# EAGLE board leonino (EAGLE 6.5.0)
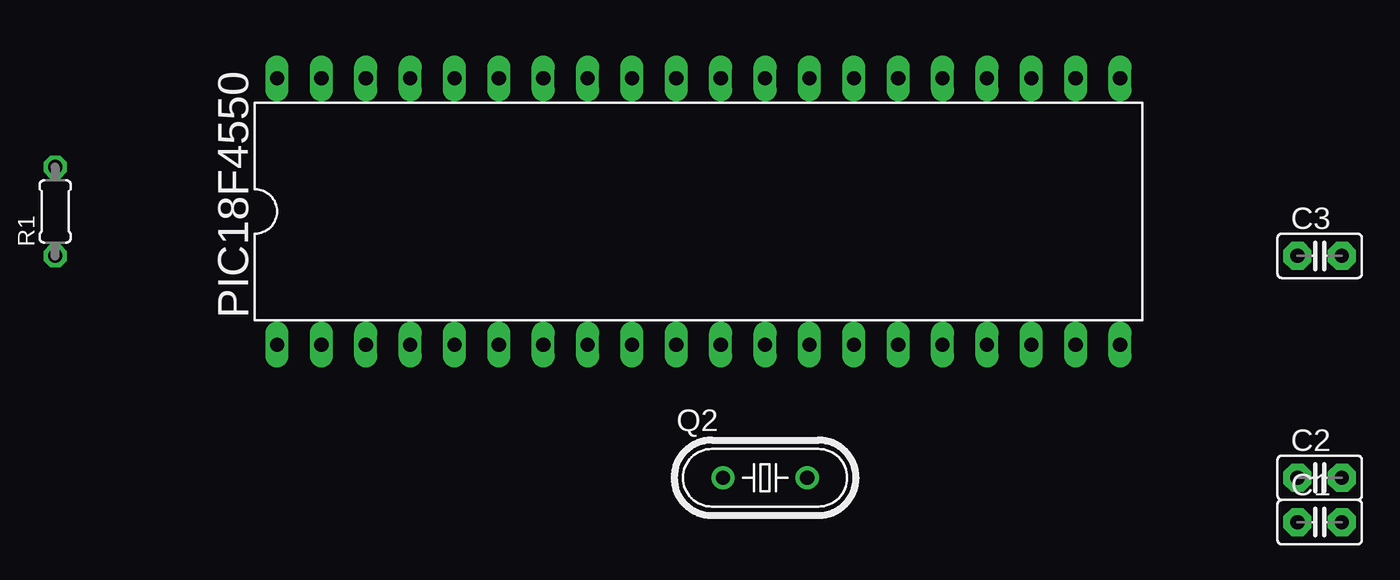
[diagram p0: board, top side]
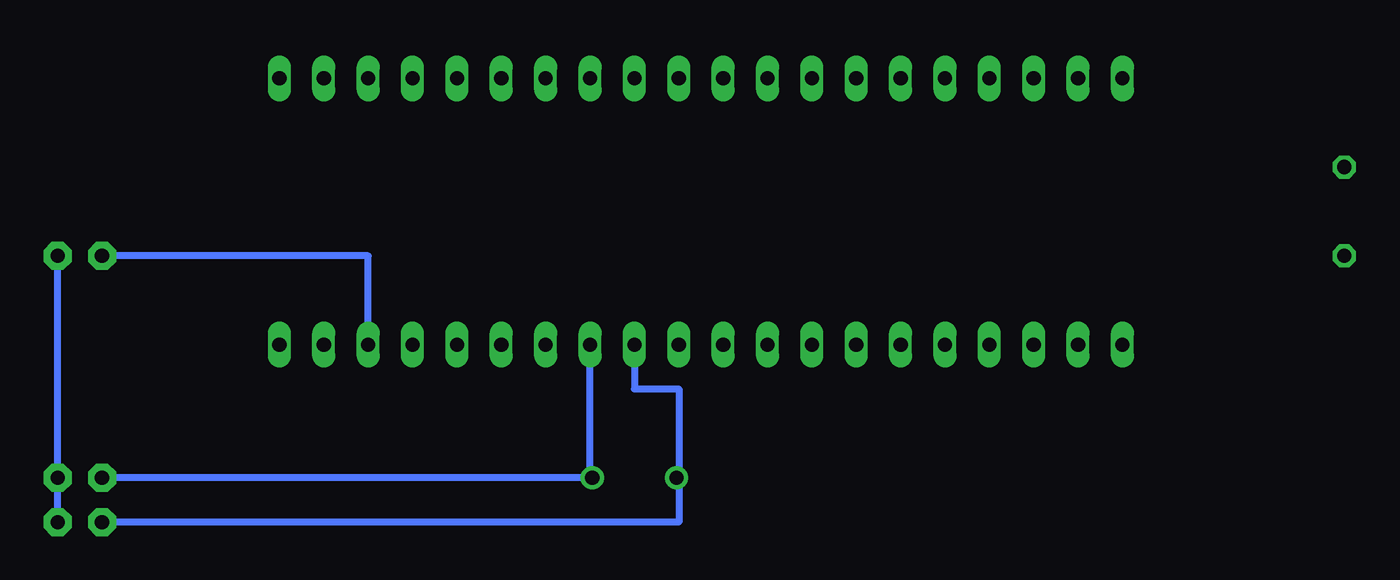
[diagram p1: board, bottom side, seen from below]

No outline drawn. Coordinates in mm, seen from the top.
Copper layers (1*16): Top 0.035mm / dielectric 1.5mm / Bottom 0.035mm
Design rules "default": minimum track width 10mil, minimum drill 24mil, track to track 8mil, track to pad 8mil, pad to pad 8mil, via to via 8mil, smd to smd 8mil, copper to edge 40mil, drill to drill 8mil, minimum pad ring 10mil, minimum via ring 8mil, stop-mask expansion 4mil, vias tented up to drill 0mil, thermal gap 10mil

## Footprints (pad centres in the part's own frame; a part is rotated, then mirrored left to right if it is on the bottom)
C2.5-2 = drill 0.813 pad 1.6 octagon: 1 -1.27,0; 2 1.27,0
DIL40 = drill 0.813 long: 1 -24.13,-7.62; 2 -21.59,-7.62; 3 -19.05,-7.62; 4 -16.51,-7.62; 5 -13.97,-7.62; 6 -11.43,-7.62; 7 -8.89,-7.62; 8 -6.35,-7.62; 9 -3.81,-7.62; 10 -1.27,-7.62; 11 1.27,-7.62; 12 3.81,-7.62; 13 6.35,-7.62; 14 8.89,-7.62; 15 11.43,-7.62; 16 13.97,-7.62; 17 16.51,-7.62; 18 19.05,-7.62; 19 21.59,-7.62; 20 24.13,-7.62; 21 24.13,7.62; 22 21.59,7.62; 23 19.05,7.62; 24 16.51,7.62; 25 13.97,7.62; 26 11.43,7.62; 27 8.89,7.62; 28 6.35,7.62; 29 3.81,7.62; 30 1.27,7.62; 31 -1.27,7.62; 32 -3.81,7.62; 33 -6.35,7.62; 34 -8.89,7.62; 35 -11.43,7.62; 36 -13.97,7.62; 37 -16.51,7.62; 38 -19.05,7.62; 39 -21.59,7.62; 40 -24.13,7.62
HC49/S = drill 0.813: 1 -2.413,0; 2 2.413,0
0204/5 = drill 0.813 octagon: 1 -2.54,0; 2 2.54,0

## Placement (x,y rotation side)
C1  18pF  [C2.5-2]  82.55,38.1 0 top
C2  18pF  [C2.5-2]  82.55,40.64 0 top
C3  220nF  [C2.5-2]  82.55,53.34 0 top
PIC18F4550  [DIL40]  46.99,55.88 0 top
Q2  20MHZ  [HC49/S]  50.8,40.64 0 top
R1  [0204/5]  10.16,55.88 90 top

## Library data of the parts
C1-C3 = capacitor-wima
PIC18F4550 = microchip
Q2 = crystal
R1 = resistor

## Nets
S$1: C2.1 PIC18F4550.13
S$2: PIC18F4550.12
S$3: C3.1 PIC18F4550.18
S$4: C1.2 C2.2 C3.2

## Tracks (layer width: path | path; a pad name or v marks a point on that pad's centre or on a via)
S$1
  Bottom 0.406: PIC18F4550.13 53.34,40.64 C2.1
S$2
  Bottom 0.406: PIC18F4550.12 50.8,45.72 48.26,45.72 48.26,38.1 81.28,38.1
S$3
  Bottom 0.406: PIC18F4550.18 66.04,53.34 C3.1
S$4
  Bottom 0.406: C1.2 C2.2 C3.2